# Altium PCB 海关全向控制器图传转接板V4.PcbDoc
Units mil, origin at the board's own origin, x right, y up, seen from the top; angles counter-clockwise.
Board outline 984.25 x 3346.46 mil, 2 copper layers (Top Layer, Bottom Layer), stack 65.792 mil thick; 32 components, 21 nets, 126 pads, 7 vias.
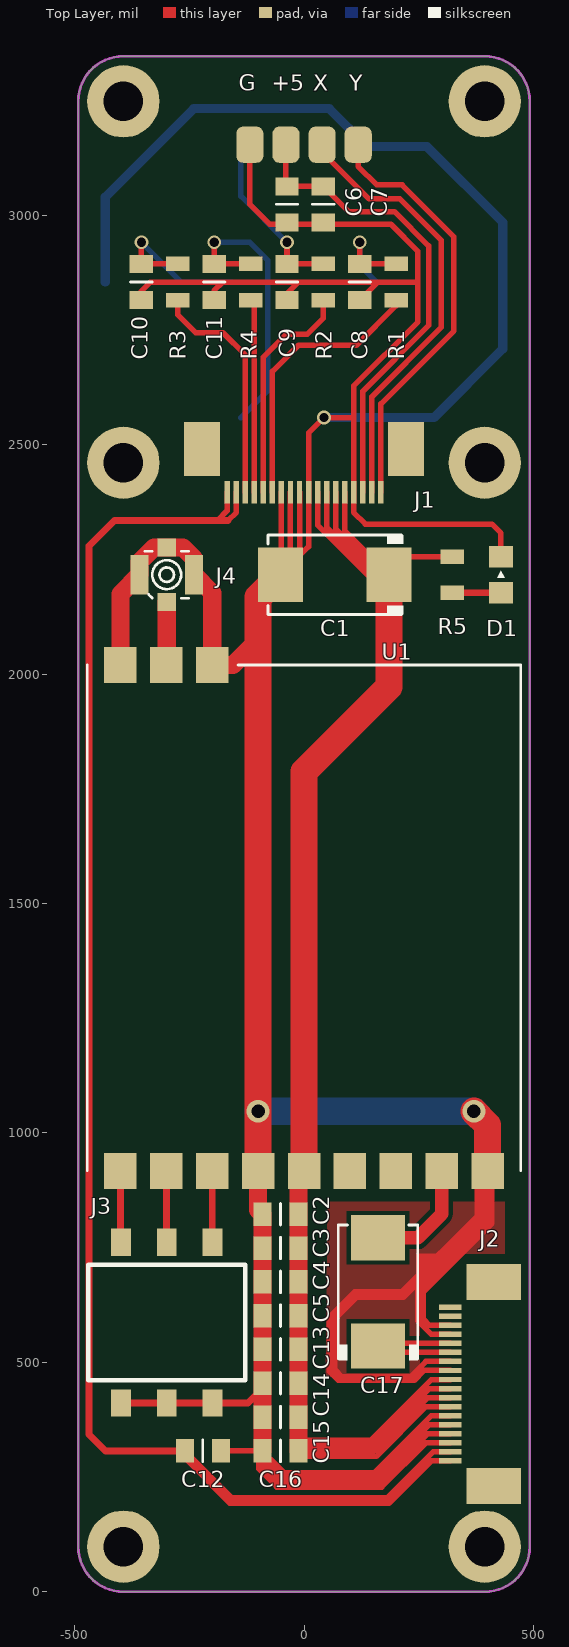
[diagram p0: Top Layer view]
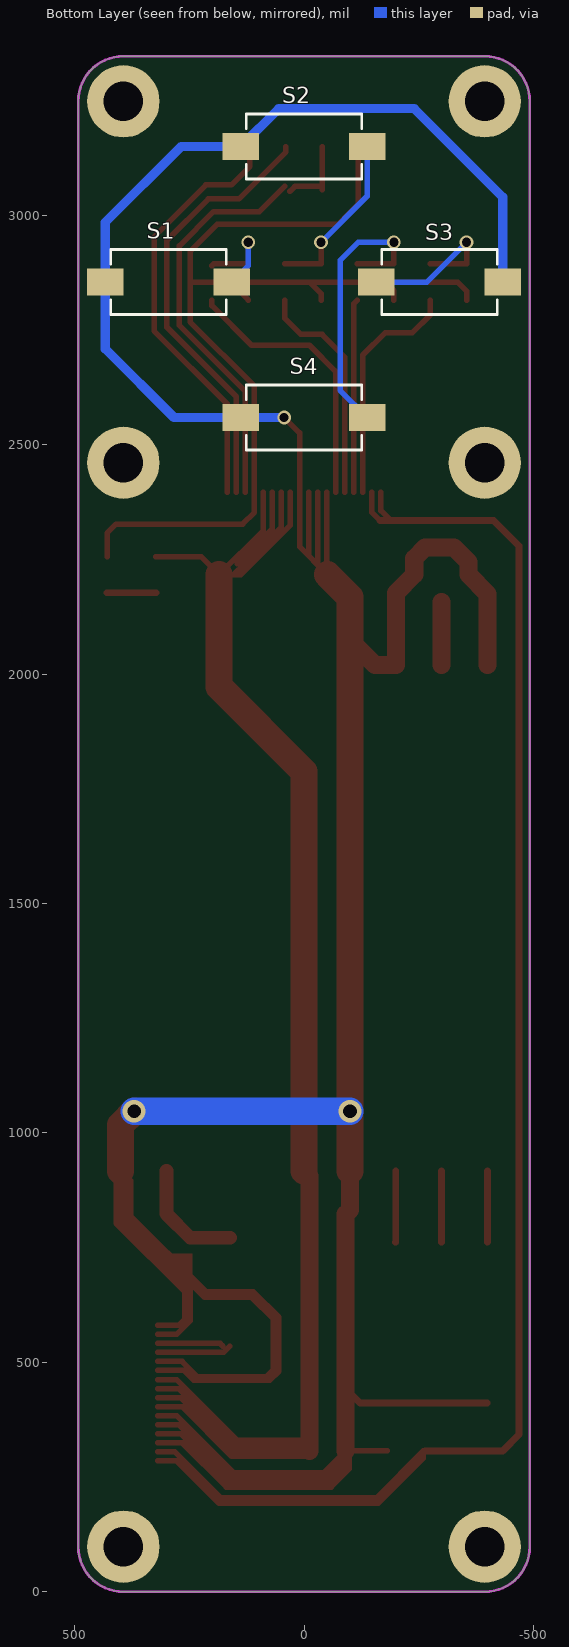
[diagram p1: Bottom Layer view, seen from below]
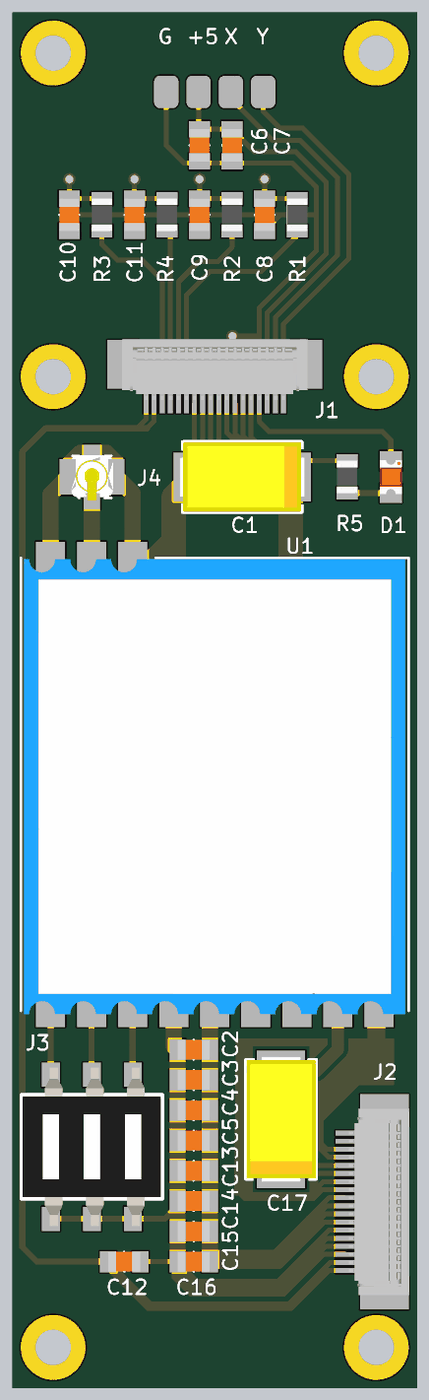
[diagram p2: 3D render of the assembled board from above, using the file's embedded part models]
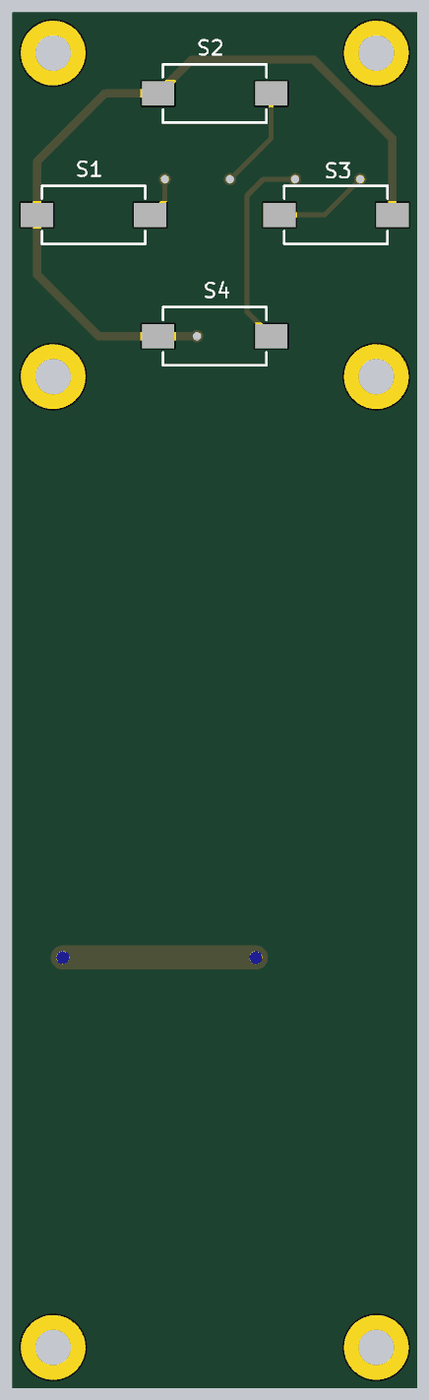
[diagram p3: 3D render of the assembled board from below, using the file's embedded part models]

## Layer stack, top to bottom
Top Solder: solder mask 0.4, Solder Resist, Dk 3.5
Top Layer: signal copper 1.4
Dielectric 1: dielectric 62.9921, FR-4, Dk 4.8
Bottom Layer: signal copper 1.4
Bottom Solder: solder mask 0.4, Solder Resist, Dk 3.5

## Board outline
-492.13,98.43 ccw(c-393.7,98.43) -393.7,0 393.7,0 ccw(c393.7,98.43) 492.13,98.43 492.13,3248.03 ccw(c393.7,3248.03) 393.7,3346.46 -393.7,3346.46 ccw(c-393.7,3248.03) -492.13,3248.03

## Design rules (kind name [scope] priority, off if disabled: settings)
Clearance [All] p1: gap=6
ComponentClearance [All] p1: gap=0 collisioncheckmode=3 verticalgap=0 showdistances=FALSE
Height [All] p1: minheight=0 maxheight=2000 prefheight=500
HoleSize [All] p1: absolutevalues=TRUE maxlimit=200 minlimit=1 maxpercent=80.000 minpercent=20.000
HoleToHoleClearance [All] p1: gap=6 allowstackedmicrovias=TRUE
MinimumSolderMaskSliver [All] p1: minsoldermaskwidth=0
PlaneConnect [All] p1: planeconnectstyle=Direct reliefexpansion=20 reliefentries=4 reliefconductorwidth=10 reliefairgap=10
PolygonConnect [All] p1: connectstyle=Direct reliefconductorwidth=10 reliefentries=4 polygonreliefangle="90 Angle" airgapwidth=10
RoutingVias [All] p1: holewidth=28 width=50 viastyle="Through Hole" minholewidth=8 minwidth=12 maxholewidth=200 maxwidth=300
SilkToSilkClearance [All] p1: silktosilkclearance=0
SilkToSolderMaskClearance [IsPad] p1: minsilkscreentomaskgap=0 clearancetoexposedcopper=TRUE
SolderMaskExpansion [All] p1: expansion=4
Width [All] p1: maxlimit=157.48 minlimit=10 preferedwidth=10
21 further rules are at their usual default settings.

## Components (designator, comment, footprint, x,y, rotation, side; value= is the part's Value field where it differs from the comment)
C1 "100uF/25V" C7343 66.93,2216.54 r180 top
C2 "10uF" C0805 -51.18,822.83 r0 top
C3 "10uF" C0805 -51.18,749.16 r0 top
C4 "10uF" C0805 -51.18,675.48 r0 top
C5 "10uF" C0805 -51.18,601.8 r0 top
C6 "10uF" C0805 -37.12,3023.62 r90 top
C7 "0.1uF" C0805 42.18,3023.62 r90 top
C8 "0.1uF" C0805 121.48,2854.33 r90 top
C9 "0.1uF" C0805 -37.12,2854.33 r90 top
C10 "0.1uF" C0805 -354.33,2854.33 r90 top
C11 "0.1uF" C0805 -195.73,2854.33 r90 top
C12 "0.1uF" C0805 -220.47,307.09 r180 top
C13 "10uF" C0805 -51.18,528.12 r0 top
C14 "0.1uF" C0805 -51.18,454.44 r0 top
C15 "1uF" C0805 -51.18,380.76 r0 top
C16 "0.1uF" C0805 -51.18,307.09 r0 top
C17 "0.1uF" C7343 161.42,653.54 r90 top
D1 "LED" LED0805 429.13,2216.54 r90 top
J1 "Jack 1x18" 0.5S-6X-18PB 0,2443.41 r180 top
J2 "Jack 1x18" 0.5S-6X-18PB 366.14,452.76 r90 top
J3 "Jack 2x3" A6S-3101-PH -299.21,586.61 r270 top
J4 "ANT-ipex" IPEX -299.21,2216.54 r0 top
R1 "1K" R0805 200.79,2854.33 r90 top
R2 "1K" R0805 42.18,2854.33 r90 top
R3 "1K" R0805 -275.03,2854.33 r90 top
R4 "1K" R0805 -116.42,2854.33 r90 top
R5 "1K" R0805 322.83,2216.54 r270 top
S1 "SW-PB" SW3X6X5 295.28,2854.33 r0 bottom locked
S2 "SW-PB" SW3X6X5 0,3149.61 r0 bottom
S3 "SW-PB" SW3X6X5 -295.28,2854.33 r180 bottom locked
S4 "SW-PB" SW3X6X5 0,2559.06 r0 bottom locked
U1 "RX5808" RX5808 0,1468.5 r270 top

## Footprints (in the part's own frame and the unit in brackets; to place one, negate y for a bottom-side part, rotate by r counter-clockwise, add the part's x,y. Pads: shape width x height; smd on the part's side, far side on the other; paste and mask are expansions set on the pad)
0.5S-6X-18PB [mm]
  rect 0.3x1.25 smd: 1(-4.25,1.2) 2(-3.75,1.2) 3(-3.25,1.2) 4(-2.75,1.2) 5(-2.25,1.2) 6(-1.75,1.2) 7(-1.25,1.2) 8(-0.75,1.2) 9(-0.25,1.2) 10(0.25,1.2) 11(0.75,1.2) 12(1.25,1.2) 13(1.75,1.2) 14(2.25,1.2) 15(2.75,1.2) 16(3.25,1.2) 17(3.75,1.2) 18(4.25,1.2)
  rect 2x3 smd: ""(-5.65,-1.2) ""(5.65,-1.2)
  body extent -5.75,-2.75 5.75,1, height 1.27
A6S-3101-PH [mm] "3位表贴拨码开关2.54mm间距"
  rect 1.5x1.1 smd: 1(-4.45,2.54) 2(4.45,2.54) 3(-4.45,0) 4(4.45,0) 5(-4.45,-2.54) 6(4.45,-2.54)
  silkscreen extent -3.2,-4.34 3.2,4.34, body extent -4.9,-4.28 4.9,4.28, height 3.4
C0805 [mm]
  rect 1x1.3 smd: 1(-1,0) 2(1,0)
  silkscreen extent 0,-0.6 0,0.6, body extent -1,-0.63 1,0.63, height 0.8
C7343 [mm] "100uF/25V"
  rect 2.5x3 smd: 1(-3,0) 2(3,0)
  silkscreen extent -3.8,-2.2 3.7,2.2, body extent -3.87,-2.15 3.87,2.15, height 2.9
IPEX [mm]
  rect 1x1 smd: 1(0,-1.5) 2(0,1.5)
  rect 1x2.2 smd: 2(-1.5,0) 2(1.5,0)
  silkscreen extent -1.2,-1.3 1.2,1.3, body extent -1.45,-1.45 1.45,1.45, height 0.9
LED0805 [mm]
  rect 1.2x1.35 smd: 1(-1,0) 2(1,0)
  silkscreen extent -0.18,-0.2 0.22,0.2, body extent -1.05,-0.68 1.05,0.67, height 0.8
R0805 [mm]
  rect 0.8x1.3 smd: 1(-1,0) 2(1,0)
  body extent -1,-0.63 1,0.63, height 0.47
RX5808 [mm]
  rect 2x1.8 smd: 1(-14,-10.16) 2(-14,-7.62) 3(-14,-5.08) 4(14,-10.16) 5(14,-7.62) 6(14,-5.08) 7(14,-2.54) 8(14,0) 9(14,2.54) 10(14,5.08) 11(14,7.62) 12(14,10.16)
  silkscreen extent -14,-12 14,12, body extent -13.91,-11.79 14.2,11.79, height 3
SW3X6X5 [mm] "2脚表贴轻触开关"
  rect 2x1.5 smd: 1(-3.5,0) 2(3.5,0)
  silkscreen extent -3.2,-1.8 3.2,1.8, body extent -4.03,-1.75 4.03,1.75, height 4.6

## Part data
C1 C17: library part "Cap Poll"
C2 C3 C4 C5 C6 C7 C8 C9 C10 C11 C12 C13 C14 C15 C16: library part "Cap Semi"
J1 J2: "插座"
J3: "双排座"
R1 R2 R3 R4 R5: library part Res, "Resistor"
S1 S2 S3 S4: "Switch"

## Free pads (board coordinates)
  rrect50% 59.06x78.74 smd: 1(118.11,3153.54) 2(39.37,3153.54) 3(-39.37,3153.54) 4(-118.11,3153.54)
  round 157.48 hole 86.61: ""(-393.7,98.43) ""(-393.7,2460.63) ""(-393.7,3248.03) ""(393.7,98.43) ""(393.7,2460.63) ""(393.7,3248.03)

## Via types
v1: diameter 30, hole 20, Top Layer to Bottom Layer, tented both sides, 5 vias
v2: diameter 50, hole 30, Top Layer to Bottom Layer, tented both sides, 2 vias

## Nets (pads, with @x,y where several pads share a name; then routed paths per layer and width w, separated by ;. In a path a pad name is that pad's centre, name@x,y a point inside that pad or via, vN(x,y) a via of type N, cw(c..) or ccw(c..) an arc to the next point about the centre after c; other vN are vias at no path point)
+5V: C6.2 C7.2 J1.3 pad.3 | length 1050.8
  Top Layer w12: C6.2@-39.37,3055.12 C6.2@-39.37,3066.93 ; pad.3@-39.37,3149.61 C6.2@-39.37,3066.93 ; C7.2@30.93,3051.74 19.68,3062.99 -35.43,3062.99 C6.2@-39.37,3066.93 ; C7.2 97.3,3007.87 196.85,3007.87 271.65,2933.07 271.65,2759.84 127.95,2616.14 J1.3
+5VAOUT: C1.1 C2.2 C3.2 C4.2 C5.2 C13.2 C14.2 C15.2 C16.2 J1.5 J1.6 J1.7 J1.8 J2.7 J2.8 J2.9 J2.10 R5.1 U1.8 | length 4594.4
  Top Layer w12: C16.2@-11.81,330.71 145.67,330.71 277.56,462.6 J2.10 ; J1.8 29.53,2324.8 137.8,2216.54 C1.1@153.54,2216.54 ; J1.7 49.21,2320.87 129.92,2240.16 ; J1.6 68.9,2316.93 145.67,2240.16 129.92,2240.16 ; J1.5 88.58,2312.99 C1.1 ; J2.7 265.75,403.54 157.48,295.28 0,295.28 C16.2 ; J2.8 269.69,423.23 153.54,307.09 C16.2 ; J2.9 273.62,442.91 149.61,318.9 0,318.9 C16.2 ; R5.1 224.41,2255.91 C1.1 ; 129.92,2240.16 C1.1@153.54,2216.54 ; C1.1@153.54,2216.54 C1.1
  Top Layer w39.37: C16.2 -11.81,330.71 -11.81,905.51 U1.8
  Top Layer w59.06: U1.8 0,1787.4 185.04,1972.44 C1.1
GND: C1.2 C2.1 C3.1 C4.1 C5.1 C6.1 C7.1 C8.1 C9.1 C10.1 C11.1 C12.1 C13.1 C14.1 C15.1 C16.1 D1.2 J1.4 J1.9 J1.10 J1.11 J1.12 J2.3 J2.4 J2.5 J2.6 J2.11 J2.12 J2.15 J2.16 J3.2 J3.4 J3.6 J4.2 pad.4 S1.2 S2.2 S3.2 S4.2 U1.1 U1.3 U1.7 U1.12 | length 13631.3
  Top Layer w12: C10.1 -354.33,2834.65 -334.65,2854.33 -177.17,2854.33 ; C11.1 -195.73,2835.77 -177.17,2854.33 ; C12.1 C16.1 ; pad.4@-118.11,3141.73 -118.11,3023.62 -74.8,2980.31 188.98,2980.31 248.03,2921.26 248.03,2854.33 ; C1.2 C1.2@-49.21,2218.5 ; J1.12 C1.2@-49.21,2218.5 ; C9.1 -37.12,2829.02 -11.81,2854.33 ; J1.11 C1.2@-29.53,2238.19 ; J1.10 C1.2@-9.84,2257.87 ; C8.1 160.85,2854.33 ; J2.3 265.75,324.8 169.29,228.35 -59.06,228.35 -98.43,267.72 -98.43,299.21 C16.1 ; J2.4 269.69,344.49 161.42,236.22 -51.18,236.22 -90.55,275.59 C16.1@-90.55,291.34 ; J2.5 273.62,364.17 157.48,248.03 -47.24,248.03 C16.1@-90.55,291.34 ; J2.6 277.56,383.86 153.54,259.84 -43.31,259.84 C16.1 ; J2.11 261.81,482.28 240.16,460.63 74.8,460.63 55.12,480.31 55.12,598.43 110.24,653.54 212.6,653.54 377.95,818.9 377.95,895.28 U1.12@389.76,907.09 ; J2.12 265.75,501.97 232.28,468.5 82.68,468.5 66.93,484.25 66.93,594.49 114.17,641.73 216.54,641.73 389.76,814.96 U1.12@389.76,907.09 ; J2.15 277.56,561.02 248.03,590.55 248.03,657.48 400,809.45 U1.12 ; J2.16 273.62,580.71 259.84,594.49 259.84,653.54 409.45,803.15 409.45,907.87 U1.12 ; D1.2 429.13,2307.09 409.45,2326.77 133.86,2326.77 108.27,2352.36 J1.4 108.27,2559.06 ; -177.17,2854.33 -11.81,2854.33 ; C16.1@-90.55,291.34 C16.1 ; C1.2@-49.21,2218.5 C1.2@-29.53,2238.19 ; C1.2@-29.53,2238.19 C1.2@-9.84,2257.87 ; -11.81,2854.33 160.85,2854.33 ; C1.2@-9.84,2257.87 9.84,2277.56 9.84,2525.59 v1(43.31,2559.06) 108.27,2559.06 ; 108.27,2559.06 108.27,2627.95 248.03,2767.72 248.03,2854.33 ; 160.85,2854.33 248.03,2854.33 ; U1.12@389.76,907.09 U1.12
  Top Layer w15: J3.6 J3.4 J3.2 -121.77,411.42 C14.1@-90.55,442.63
  Top Layer w39.37: U1.1 -400,2174.8 -358.27,2216.54 -358.27,2244.09 -326.77,2275.59 -299.21,2275.59 -263.78,2275.59 -240.16,2251.97 -240.16,2216.54 -200,2176.38 U1.3 -155.12,2019.68 -100,2074.8 ; U1.7 -100,832.28 C2.1 C3.1 C4.1 C5.1 C13.1 C14.1 -90.55,442.63 C15.1 C16.1
  Top Layer w59.06: U1.7 v2(-100,1047.24) -100,2074.8 -100,2167.72 C1.2 ; v2(370.08,1047.24) 400,1017.32 U1.12
  Bottom Layer w20: S3.2 -433.07,3039.37 -240.16,3232.28 55.12,3232.28 S2.2 267.72,3149.61 433.07,2984.25 S1.2 433.07,2708.66 283.47,2559.06 S4.2 v1(43.31,2559.06)
  Bottom Layer w59.06: v2(-100,1047.24) v2(370.08,1047.24)
KEY5: J1.13 R1.1 | length 604.3
  Top Layer w12: J1.13 -68.9,2659.45 -11.81,2716.54 114.17,2716.54 200.79,2803.15 R1.1
KEY6: J1.14 R2.1 | length 500
  Top Layer w12: J1.14 -88.58,2690.94 -39.37,2740.16 6.75,2740.16 42.18,2775.59 R2.1
KEY7: J1.16 R3.1 | length 514.3
  Top Layer w12: R3.1 -275.03,2782.9 -236.22,2744.09 -177.17,2744.09 -127.95,2694.88 J1.16
KEY8: J1.15 R4.1 | length 422.2
  Top Layer w12: R4.1 -108.27,2806.81 J1.15
NetC8_2: C8.2 R1.2 S1.1 | length 229.7
  Top Layer w12: v1(121.48,2940.94) C8.2 196.85,2893.7 R1.2@200.79,2889.76
  Bottom Layer w12: v1(121.48,2940.94) 121.48,2890.33 S1.1
NetC9_2: C9.2 R2.2 S2.1 | length 376.9
  Top Layer w12: v1(-37.12,2940.94) C9.2 R2.2
  Bottom Layer w12: S2.1 -137.8,3041.62 v1(-37.12,2940.94)
NetC10_2: C10.2 R3.2 S3.1 | length 359.3
  Top Layer w12: v1(-354.33,2940.94) C10.2 R3.2
  Bottom Layer w12: v1(-354.33,2940.94) -267.72,2854.33 S3.1
NetC11_2: C11.2 R4.2 S4.1 | length 626.8
  Top Layer w12: v1(-195.73,2940.94) C11.2 R4.2
  Bottom Layer w12: v1(-195.73,2940.94) -118.11,2940.94 -78.74,2901.57 -78.74,2618.11 S4.1
NetC17_2: C17.2 U1.11 | length 253.8
  Top Layer w30: C17.2 248.03,771.65 300,823.62 U1.11
NetD1_1: D1.1 R5.2 | length 106.3
  Top Layer w15: R5.2 D1.1
NetJ3_1: J3.1 U1.6 | length 155.8
  Top Layer w15: U1.6 -200,762.6 J3.1
NetJ3_3: J3.3 U1.5 | length 155.8
  Top Layer w15: U1.5 -300,762.6 J3.3
NetJ3_5: J3.5 U1.4 | length 155.8
  Top Layer w15: U1.4 -400,762.6 J3.5
NetJ4_1: J4.1 U1.2 | length 138.1
  Top Layer w39.37: U1.2 -299.21,2020.47 J4.1
PADDET: C12.2 J1.17 J1.18 J2.1 J2.2 | length 3963.6
  Top Layer w12: -188.98,2334.65 -167.32,2356.3 J1.18 ; -165.35,2334.65 -147.64,2352.36 J1.17 ; J2.1 277.56,285.43 185.04,192.91 -161.42,192.91 -259.84,291.34 -259.84,303.15 C12.2 -157.48,204.72 181.1,204.72 281.5,305.12 J2.2
  Top Layer w15: C12.2@-259.84,303.15 -263.78,307.09 -433.07,307.09 -468.5,342.52 -468.5,2279.53 -413.39,2334.65 -188.98,2334.65 -165.35,2334.65
ROCKER1_X: J1.2 pad.2 | length 963.1
  Top Layer w12: pad.2@39.37,3149.61 39.37,3137.8 141.73,3035.43 208.66,3035.43 299.21,2944.88 299.21,2755.91 147.64,2604.33 J1.2
ROCKER1_Y: J1.1 pad.1 | length 942.1
  Top Layer w12: pad.1 118.11,3106.3 158.53,3065.88 213.65,3065.88 326.77,2952.76 326.77,2748.03 167.32,2588.58 J1.1
VEDIO: C17.1 J2.13 J2.14 | length 307.4
  Top Layer w12: C17.1 175.2,521.65 J2.13 ; C17.1@177.17,535.43 183.07,541.34 J2.14
pads on no net: J1. J2. J2.17 J2.18 U1.9 U1.10

## Polygon pours and split planes (outlines as drawn)
GND on Top Layer "Top Layer-No Net" (solid, pour order 4): 51.18,850.39 437.01,850.39 437.01,736.22 51.18,736.22
GND on Top Layer "Top Layer-No Net" (solid, pour order 6): 51.18,850.39 251.97,850.39 251.97,472.44 244.09,464.57 240.16,468.5 47.24,468.5

## Keep-outs
Keep-Out Layer:
  the board outline again, w6

## Other copper
Top Layer:
  region net GND: 303.15,751.97 287.4,736.22 244.09,736.22 244.09,685.04

## Silkscreen, mask and mechanical layers (free items; w line width, h text height)
Top Overlay:
  text "G" at -141.73,3271.65 h35
  text "+5" at -70.87,3271.65 h35
  text "X" at 19.68,3271.65 h35
  text "Y" at 98.43,3271.65 h35